# Altium PCB PCB2.PcbDoc
Units mil, origin at the board's own origin, x right, y up, seen from the top; angles counter-clockwise.
Board outline 2000 x 1200 mil, 4 copper layers (Top Layer, Internal Plane 1, Signal Layer 1, Bottom Layer), stack 30.634 mil thick; 22 components, 25 nets, 118 pads, 19 vias.
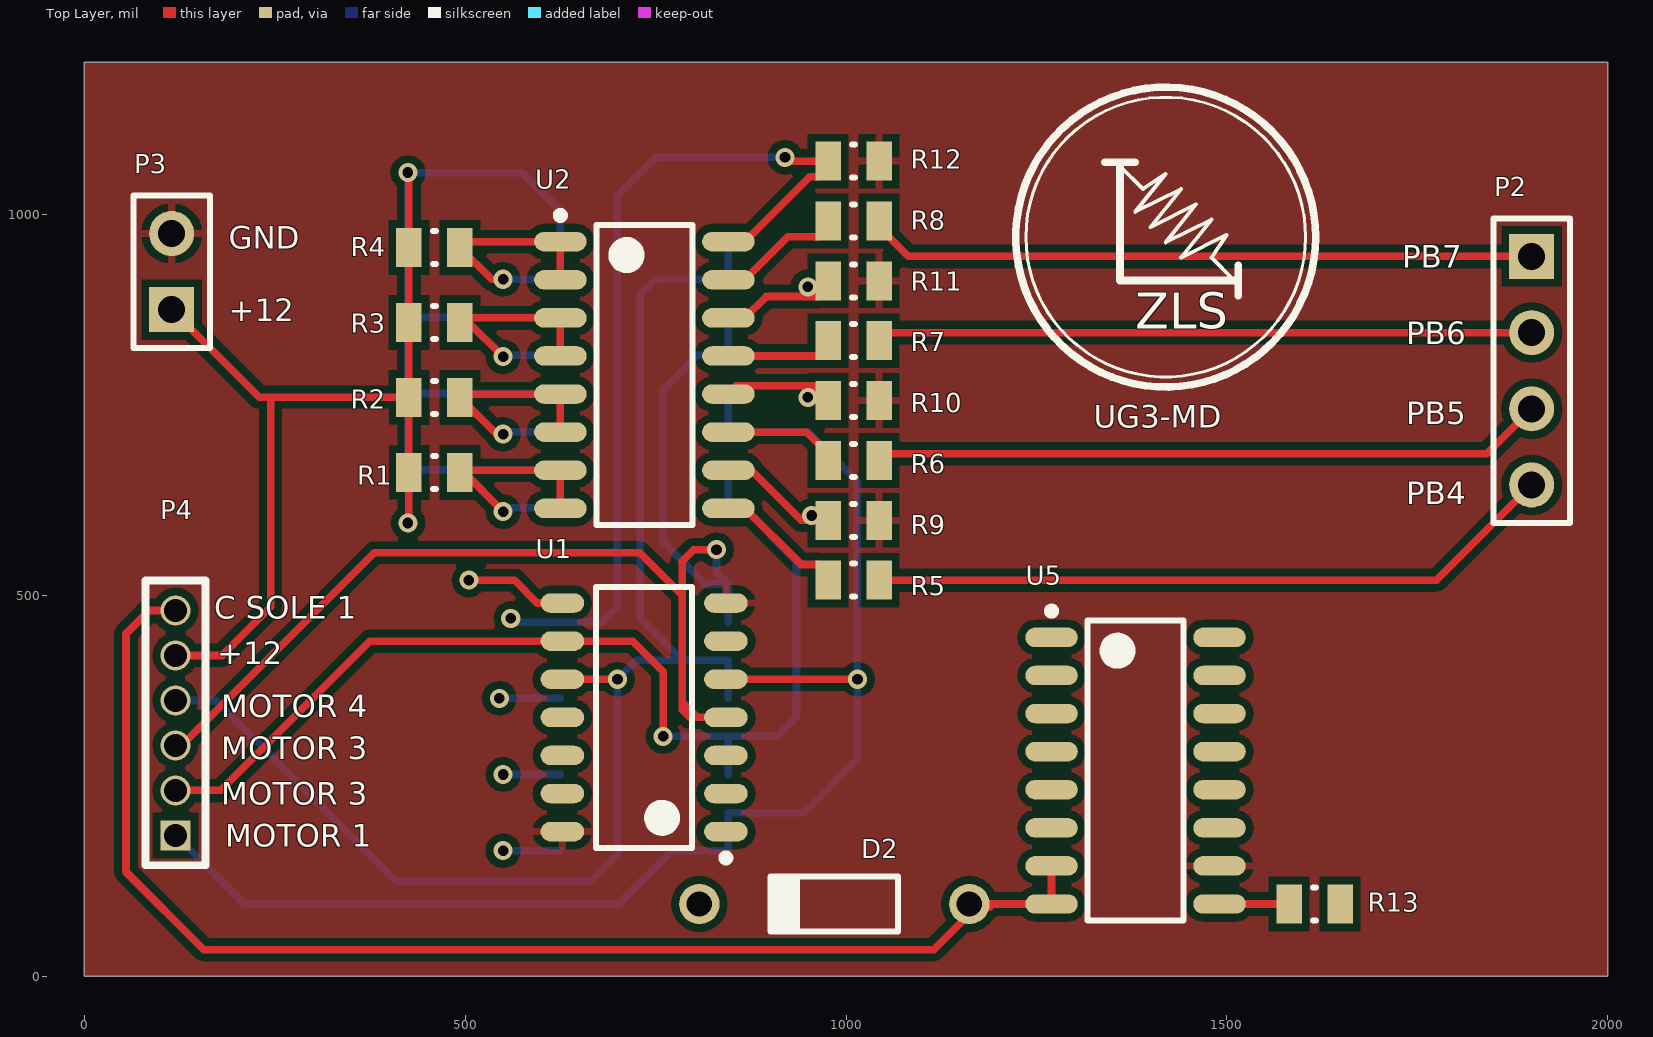
[diagram p0: Top Layer view]
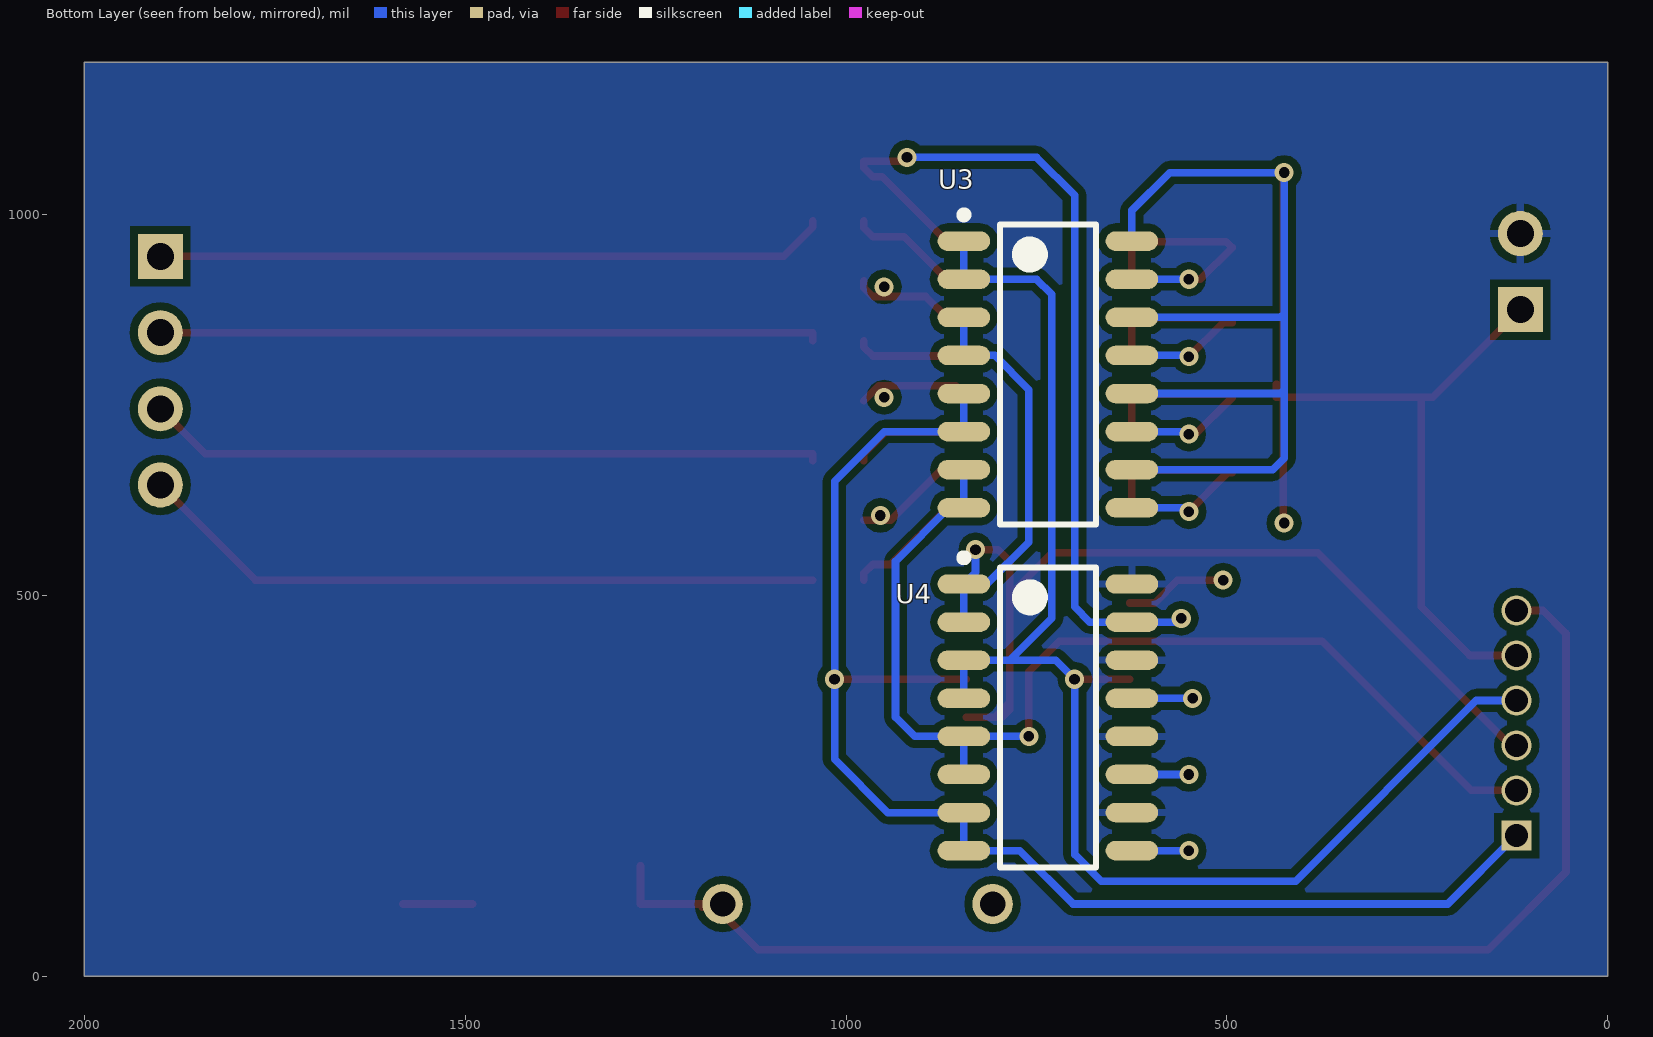
[diagram p1: Bottom Layer view, seen from below]
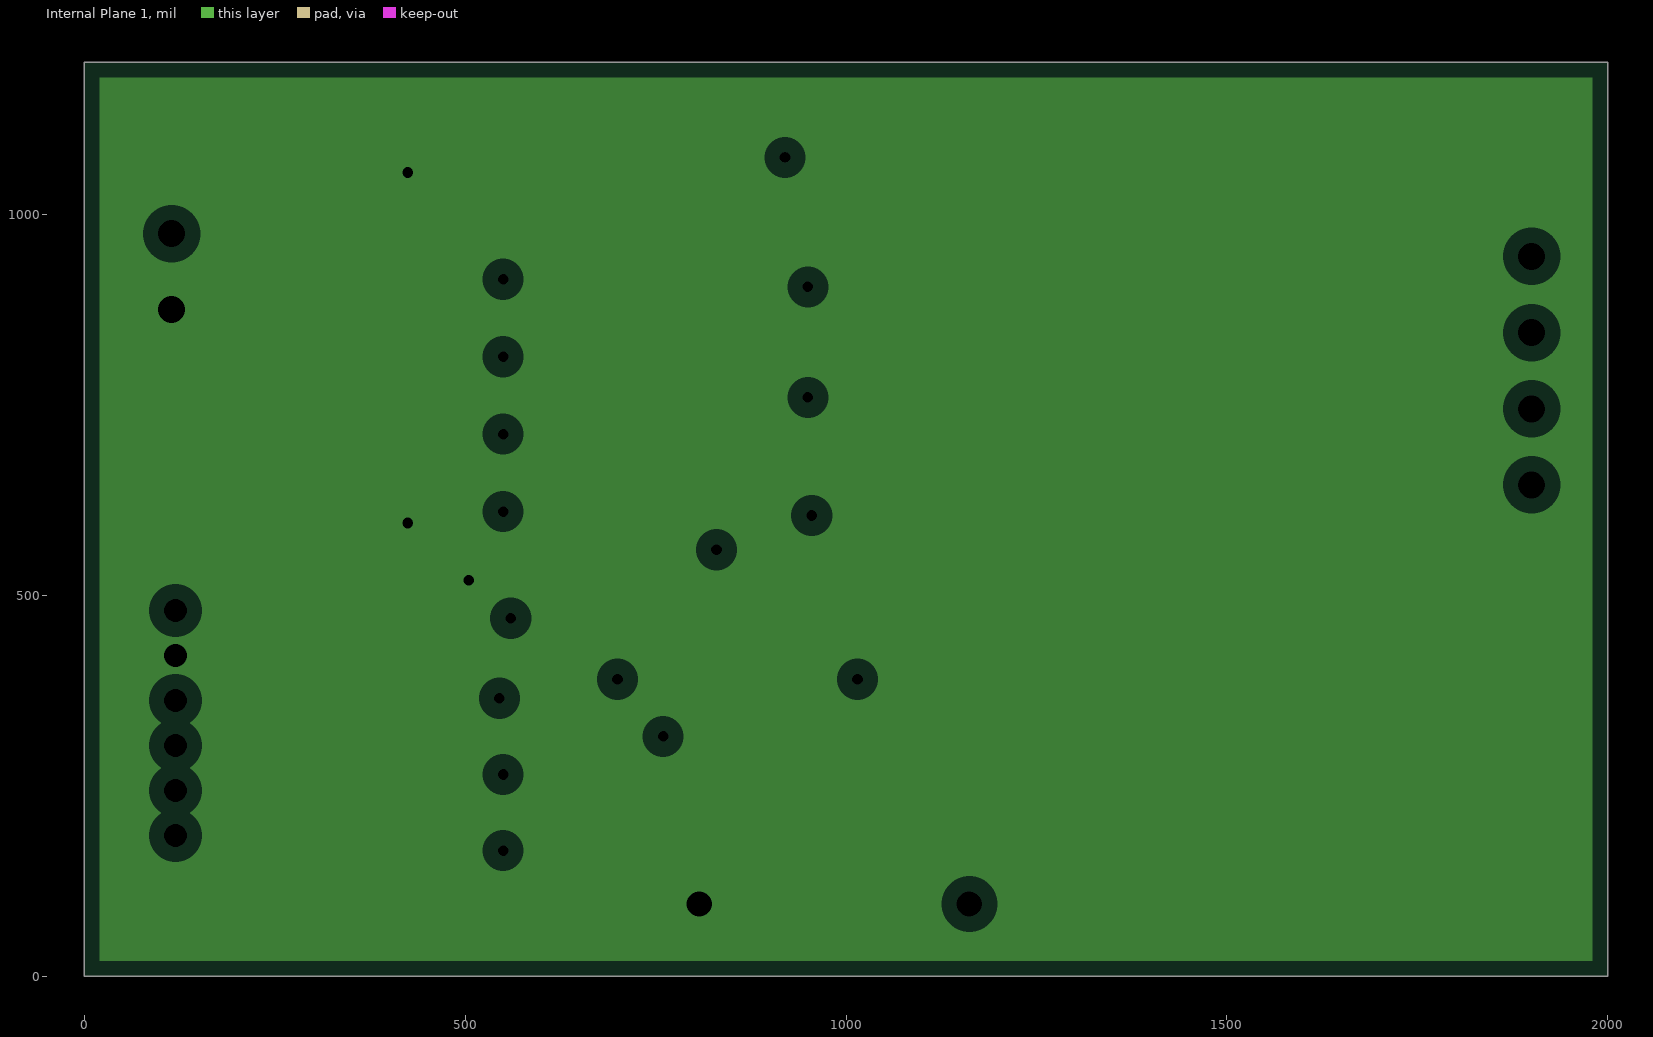
[diagram p2: Internal Plane 1, clearances drawn from the general rule]
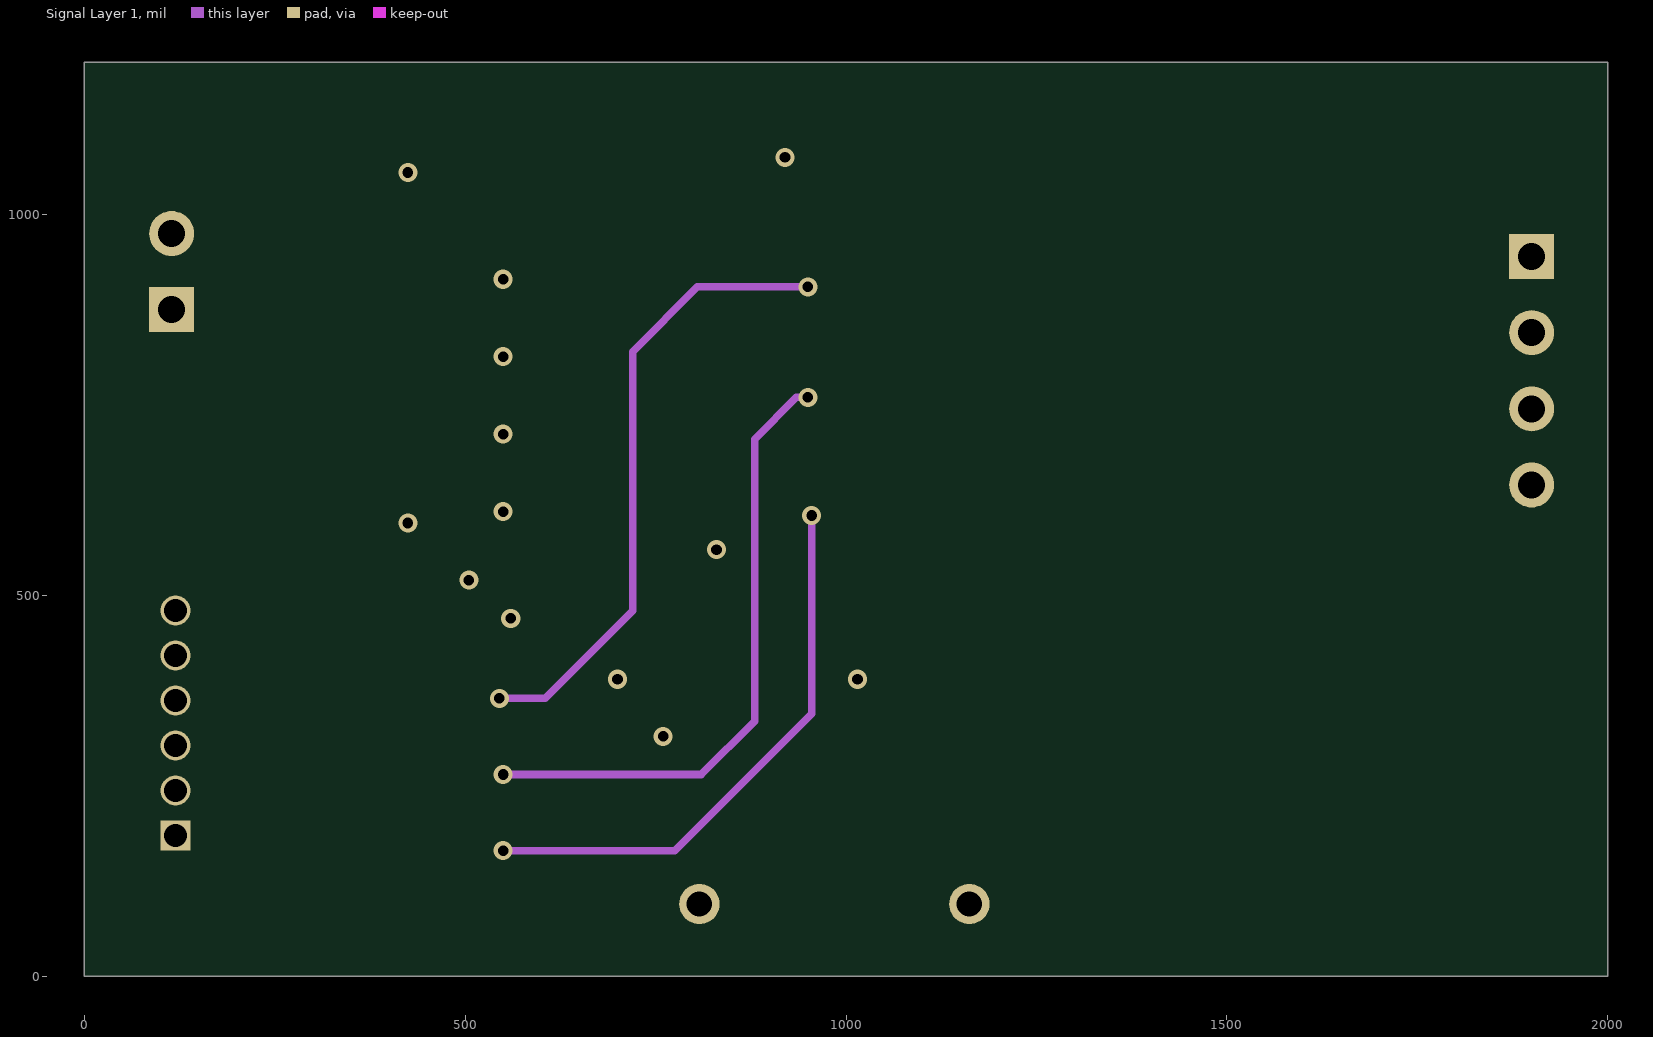
[diagram p3: Signal Layer 1]

## Layer stack, top to bottom
Top Solder: solder mask 0.4, Solder Resist, Dk 3.5
Top Layer: signal copper 1.4
Dielectric 1: core 10, FR-4, Dk 4.2
Internal Plane 1: plane copper 1.417, net +12
Dielectric 3: prepreg 5, Dk 4.2
Signal Layer 1: signal copper 1.417
Dielectric 2: core 10, Dk 4.2
Bottom Layer: signal copper 1.4
Bottom Solder: solder mask 0.4, Solder Resist, Dk 3.5

## Board outline
0,0 2000,0 2000,1200 0,1200

## Design rules (kind name [scope] priority, off if disabled: settings)
Clearance [All] p1: gap=10 ignorepadtopadclearanceinfootprint=FALSE except(0: Arc-Hole Track-Hole SMDPad-Hole THPad-Hole Via-Hole Fill-Hole Poly-Hole Region-Hole Text-Hole)
PlaneClearance [All] p1: clearance=20
PlaneConnect [All] p1: planeconnectstyle=Relief reliefexpansion=20 reliefentries=4 reliefconductorwidth=10 reliefairgap=10
PolygonConnect [All] p1: connectstyle=Relief reliefconductorwidth=10 reliefentries=4 polygonreliefangle="90 Angle" airgapwidth=10
RoutingVias [All] p1: holewidth=28 width=50 viastyle="Through Hole" minholewidth=28 minwidth=50 maxholewidth=28 maxwidth=50
SilkToSolderMaskClearance [IsPad] p1: minsilkscreentomaskgap=5 clearancetoexposedcopper=TRUE
SolderMaskExpansion [All] p1: expansion=4
Width [All] p1: maxlimit=10 minlimit=10 preferedwidth=10
27 further rules are at their usual default settings.

## Components (designator, comment, footprint, x,y, rotation, side; value= is the part's Value field where it differs from the comment)
D2 "1N4148" NXP-SOD27-2_V 984.73,95 r180 top
P2 "Header 4" HDR1X4 1900,945 r270 top
P3 "Header 2" HDR1X2 115,875 r90 top
P4 "JF-6" JF-6 120,185 r90 top
R1 "100k" RESC0805(2012)_L 459.8,661.34 r0 top
R2 "100k" RESC0805(2012)_L 459.8,759.76 r0 top
R3 "100k" RESC0805(2012)_L 459.8,858.19 r0 top
R4 "100k" RESC0805(2012)_L 459.8,956.61 r0 top
R5 "100k" RESC0805(2012)_L 1010,520 r0 top
R6 "100k" RESC0805(2012)_L 1010,677.14 r0 top
R7 "100k" RESC0805(2012)_L 1010,834.29 r0 top
R8 "100k" RESC0805(2012)_L 1010,991.43 r0 top
R9 "100k" RESC0805(2012)_L 1010,598.57 r180 top
R10 "100k" RESC0805(2012)_L 1010,755.71 r180 top
R11 "100k" RESC0805(2012)_L 1010,912.86 r180 top
R12 "100k" RESC0805(2012)_L 1010,1070 r180 top
R13 "1.2k" RESC0805(2012)_L 1615,95 r0 top value=100k
U1 "MMAD1107" MMAD1107 735,340 r180 top
U2 "MMPQ2222A" MMPQ2222A 735.39,789.29 r0 top
U3 "MMPQ22907A" MMPQ22907A 735,790 r180 bottom
U4 "MMPQ2222A" MMPQ2222A 735,340 r180 bottom
U5 "MMPQ2222A" MMPQ2222A 1380,270 r0 top

## Footprints (in the part's own frame and the unit in brackets; to place one, negate y for a bottom-side part, rotate by r counter-clockwise, add the part's x,y. Pads: shape width x height; smd on the part's side, far side on the other; paste and mask are expansions set on the pad)
HDR1X2 [mm] "Connector; Header; 2 Position"
  rect 1.5x1.5 hole 0.9: 1(0,0)
  round 1.5 hole 0.9: 2(2.54,0)
  silkscreen extent -1.27,-1.27 3.81,1.27
HDR1X4 [mm] "Connector; Header; 4 Position"
  rect 1.5x1.5 hole 0.9: 1(0,0)
  round 1.5 hole 0.9: 2(2.54,0) 3(5.08,0) 4(7.62,0)
  silkscreen extent -1.27,-1.27 8.89,1.27
JF-6 [mm] "Microtech Connector"
  rect 1x1 hole 0.762: 1(0,0)
  round 1 hole 0.762: 2(1.5,0) 3(3,0) 4(4.5,0) 5(6,0) 6(7.5,0)
  silkscreen extent -1,-1 8.5,1
MMAD1107 [mm] "SOIC, 14-Leads, Body 8.63x3.91mm, Pitch 1.27mm, IPC Medium Density"
  oval 1.45x0.65 smd: 1(-2.725,3.81) 2(-2.725,2.54) 3(-2.725,1.27) 4(-2.725,0) 5(-2.725,-1.27) 6(-2.725,-2.54) 7(-2.725,-3.81) 8(2.725,-3.81) 9(2.725,-2.54) 10(2.725,-1.27) 11(2.725,0) 12(2.725,1.27) 13(2.725,2.54) 14(2.725,3.81)
  silkscreen extent -2.85,-4.35 1.6,4.81, body extent -2.99,-4.35 3,4.35, height 1.75
MMPQ2222A [mm]
  oval 1.75x0.65 smd: 1(-2.8,4.445) 2(-2.8,3.175) 3(-2.8,1.905) 4(-2.8,0.635) 5(-2.8,-0.635) 6(-2.8,-1.905) 7(-2.8,-3.175) 8(-2.8,-4.445) 9(2.8,-4.445) 10(2.8,-3.175) 11(2.8,-1.905) 12(2.8,-0.635) 13(2.8,0.635) 14(2.8,1.905) 15(2.8,3.175) 16(2.8,4.445)
  silkscreen extent -2.92,-5 1.6,5.44, body extent -2,-5 2,5, height 1.75
MMPQ22907A [mm]
  oval 1.75x0.65 smd: 1(-2.8,4.445) 2(-2.8,3.175) 3(-2.8,1.905) 4(-2.8,0.635) 5(-2.8,-0.635) 6(-2.8,-1.905) 7(-2.8,-3.175) 8(-2.8,-4.445) 9(2.8,-4.445) 10(2.8,-3.175) 11(2.8,-1.905) 12(2.8,-0.635) 13(2.8,0.635) 14(2.8,1.905) 15(2.8,3.175) 16(2.8,4.445)
  silkscreen extent -2.93,-5 1.6,5.44, body extent -2,-5 2,5, height 1.75
NXP-SOD27-2_V [mm] "SOD27, 2-Leads, Dia 1.85mm, Body Length 4.25mm, Pin Spacing 9mm"
  round 1.35 hole 0.85: 1(-4.5,0) 2(4.5,0)
  silkscreen extent -2.12,-0.92 2.12,0.92, body extent -4.78,-0.92 4.78,0.92, height 1.84
RESC0805(2012)_L [mm] "Chip Resistor, Body 2.0x1.3mm, IPC High Density"
  rect 0.85x1.3 smd: 1(-0.85,0) 2(0.85,0)
  silkscreen extent -0.05,-0.55 0.05,0.55, body extent -1.1,-0.67 1.1,0.68, height 0.7

## Part data
D2: library part CMP-0648-00002-1, "High-speed Diode, 100 V, 450 mA, 2-Pin SOD27, RoHS", Manufacturer="NXP Semiconductors", Cd="4 pF Max.", ComponentLink1Description="Manufacturer URL", ComponentLink1URL=http://www.nxp.com/, ComponentLink2Description=Datasheet, ComponentLink2URL=http://www.nxp.com/documents/data_sheet/1N4148_1N4448.pdf, ComponentLink3Description="Package Specification", ComponentLink3URL=http://www.nxp.com/documents/data_sheet/1N4148_1N4448.pdf, Configuration=Single, DatasheetVersion=Aug-04, IF="200 mA Max.", IFRM="450 mA", IFSM="4 A Max.", IR (VR="20 V)=25 nA", Mounting Technology="Through Hole", PackageDescription="2-Pin Hermetically Sealed Glass Package, Axial Leaded, Dia 1.85 mm, Body Length 4.25 mm, Lead Spread 25.4 mm", PackageReference=SOD27, PackageVersion=Aug-04, PartNumber=1N4148, RoHS=TRUE, Trr="4 ns Max.", VF (IF="10 mA)=1 V", VR="100 V Max."
P2: "Header, 4-Pin", LatestRevisionDate=17-Jul-2002, LatestRevisionNote="Re-released for DXP Platform.", Publisher="Altium Limited"
P3: "Header, 2-Pin", LatestRevisionDate=17-Jul-2002, LatestRevisionNote="Re-released for DXP Platform.", Publisher="Altium Limited"
R1 R2 R3 R4 R5 R6 R7 R8 R9 R10 R11 R12 R13: library part CMP-1013-00215-1, "2R55 0.125W 1% 0805 (2012 Metric)  SMD", Case-EIA=0805, Case-Metric=2012, Power="0.125 W", Tolerance="1 %", Technology=SMT

## Via types
v1: diameter 25, hole 14, Top Layer to Bottom Layer, 19 vias

## Nets (pads, with @x,y where several pads share a name; then routed paths per layer and width w, separated by ;. In a path a pad name is that pad's centre, name@x,y a point inside that pad or via, vN(x,y) a via of type N, cw(c..) or ccw(c..) an arc to the next point about the centre after c; other vN are vias at no path point)
+12: D2.2 P3.1 P4.5 R1.1 R2.1 R3.1 R4.1 U1.8 U3.10 U3.12 U3.14 U3.16 | length 2665.1
  Top Layer w10: P3.1 230,760 245,760 ; P4.5 181.22,421.22 245,485 245,760 ; v1(425,595) 426.34,596.34 R1.1 R2.1 R2.1@426.34,760 ; v1(425,1055) 426.34,1053.66 R4.1 R3.1 R2.1@426.34,768.62 ; v1(505,520) 565,520 595,490 U1.8 ; 245,760 R2.1@426.34,760 ; R2.1@426.34,760 435,760 435,777.28 R2.1@426.34,768.62 ; R2.1@426.34,760 R2.1@426.34,768.62
  Bottom Layer w10: U3.10 440,665 425,680 425,770 ; U3.12 430,765 425,770 ; U3.14 430,865 425,870 ; U3.16 624.76,1005.24 575,1055 v1(425,1055) 425,870 ; 425,770 425,870
BAT_COM: P3.2 R9.1 R10.1 R11.1 R12.1 U1.7 U1.14 U4.10 U4.12 U4.14 U4.16 U5.10
"C MOTOR 1": P4.1 U1.5 U3.5 U3.6 U4.7 U4.8 | length 1824.7
  Top Layer w10: U1.5 v1(1015,390)
  Bottom Layer w10: P4.1 210,95 702,95 772,165 U4.8 U4.7 945,215 1015,285 1015,650 950,715 U3.6 U3.5
"C MOTOR 2": P4.2 U1.9 U3.7 U3.8 U4.5 U4.6 | length 1431.8
  Top Layer w10: P4.2 179.06,244.06 375,440 U1.9 720,440 760,400 v1(760,315)
  Bottom Layer w10: v1(760,315) U4.5 ; U4.6 U4.5 ; U3.7 U3.8 865,615 935,545 935,340 910,315 U4.5
"C MOTOR 3": P4.3 U1.4 U3.3 U3.4 U4.1 U4.2 | length 1832.1
  Top Layer w10: P4.3 128.11,303.11 381,556 729,556 785,500 785,360 ; v1(830,560) 800,560 785,545 785,360 ; U1.4 805,340 ; 785,360 785,350 795,340 805,340 ; 785,360 805,340
  Bottom Layer w10: v1(830,560) 830,530.24 U4.1 ; U4.2 U4.1 ; U3.3 U3.4 805,815 760,770 760,570 815,515 U4.1
"C MOTOR 4": P4.4 U1.10 U3.1 U3.2 U4.3 U4.4 | length 1876.9
  Top Layer w10: U1.10 v1(700,390)
  Bottom Layer w10: P4.4 172.83,362.17 410,125 665,125 700,160 v1(700,390) 725,415 785,415 ; U4.4 U4.3 785,415 ; U3.1 U3.2 750,915 730,895 730,470 785,415
"C SOLE 2": D2.1 P4.6 U5.7 U5.8 | length 1724.8
  Top Layer w10: P4.6 85.28,480.28 55,450 55,137 157,35 1115,35 1171,91 1188.78,91 1188.78,95 U5.8 U5.7
NetR1_2: R1.2 U2.7 U2.8 U3.9 | length 337.9
  Top Layer w10: v1(550,610) 498.66,661.34 R1.2 496.22,664.29 U2.7 U2.8
  Bottom Layer w10: v1(550,610) 555,615 U3.9
NetR2_2: R2.2 U2.5 U2.6 U3.11 | length 336.6
  Top Layer w10: v1(550,711.67) 541.36,711.67 R2.2 497.8,764.29 U2.5 625.16,759.76 U2.6
  Bottom Layer w10: v1(550,711.67) 553.33,715 U3.11
NetR3_2: R3.2 U2.3 U2.4 U3.13 | length 335.2
  Top Layer w10: v1(550,813.33) 505.14,858.19 R3.2 499.37,864.29 U2.3 U2.4
  Bottom Layer w10: v1(550,813.33) 551.67,815 U3.13
NetR4_2: R4.2 U2.1 U2.2 U3.15 | length 333.8
  Top Layer w10: v1(550,915) 534.88,915 R4.2 500.94,964.29 U2.1 U2.2
  Bottom Layer w10: v1(550,915) U3.15
NetR5_1: R5.1 U2.9 | length 175.2
  Top Layer w10: U2.9 867.28,614.29 940.98,540.59 964.8,540.59 976.54,528.86 R5.1
NetR6_1: R6.1 U2.11 | length 151.5
  Top Layer w10: U2.11 948.25,714.29 976.54,686 R6.1
NetR7_1: R7.1 U2.13 | length 144
  Top Layer w10: U2.13 964.8,814.29 976.54,826.02 R7.1
NetR8_1: R8.1 U2.15 | length 168
  Top Layer w10: U2.15 867.28,914.29 923.83,970.84 964.8,970.84 976.54,982.57 R8.1
NetR9_2: R9.2 U2.10 U4.9 | length 972.5
  Top Layer w10: U2.10 875.71,664.29 941.43,598.57 R9.2
  Signal Layer 1 w10: v1(550,165) 775,165 955,345 v1(955,605)
  Bottom Layer w10: v1(550,165) U4.9
NetR10_2: R10.2 U2.12 U4.11 | length 1039.9
  Top Layer w10: U2.12 856.34,775 957.25,775 R10.2
  Signal Layer 1 w10: v1(550,265) 810,265 880,335 880,705 935,760 v1(950,760)
  Bottom Layer w10: v1(550,265) U4.11
NetR11_2: R11.2 U2.14 U4.13 | length 1063.8
  Top Layer w10: U2.14 867.28,864.29 895.26,892.27 964.8,892.27 976.54,904 R11.2
  Signal Layer 1 w10: v1(545,365) 605,365 720,480 720,820 805,905 v1(950,905)
  Bottom Layer w10: v1(545,365) U4.13
NetR12_2: R12.2 U2.16 U4.15 | length 1169.6
  Top Layer w10: U2.16 867.28,964.29 952.4,1049.41 964.8,1049.41 976.54,1061.14 R12.2 925,1070 v1(920,1075)
  Bottom Layer w10: v1(560,470) 565,465 U4.15 680,465 700,485 700,1025 750,1075 v1(920,1075)
NetR13_1: R13.1 U5.9 | length 91.3
  Top Layer w10: U5.9 R13.1
PB4: P2.4 R5.2 | length 908.3
  Top Layer w10: R5.2 1775,520 P2.4
PB5: P2.3 R6.2 | length 889.8
  Top Layer w10: R6.2 1043.46,686 1841,686 P2.3
PB6: P2.2 R7.2 | length 867.2
  Top Layer w10: R7.2 1043.46,845 P2.2
PB7: P2.1 R8.2 | length 880.7
  Top Layer w10: R8.2 1043.46,983 1081.46,945 P2.1
PC5: R13.2
pads on no net: U1.1 U1.2 U1.3 U1.6 U1.11 U1.12 U1.13 U5.1 U5.2 U5.3 U5.4 U5.5 U5.6 U5.11 U5.12 U5.13 U5.14 U5.15 U5.16

## Polygon pours and split planes (outlines as drawn)
BAT_COM on Top Layer "GND" (solid, pour order 0): 0,1200 0,0 2000,0 2000,1200
BAT_COM on Bottom Layer "GND" (solid, pour order 2): 0,1200 0,0 2000,0 2000,1200
+12 on Internal Plane 1 (split plane): 1979.9,20.1 20.1,20.1 20.1,1179.9 1979.9,1179.9

## Silkscreen, mask and mechanical layers (free items; w line width, h text height)
Top Overlay:
  circle w10: c1419.62,970.33 r196.85
  circle w3.94: c1419.62,970.33 r183.58
  lines w5: 1359.62,1063.33 1389.62,1033.33 1419.62,1053.33 1379.62,1003.33 1439.62,1033.33 1399.62,983.33 1459.62,1013.33 1419.62,963.33 1479.62,993.33 1439.62,943.33 1499.62,973.33 1479.62,943.33 1509.62,913.33
  lines w10: 1339.62,1068.33 1379.62,1068.33 ; 1359.62,1063.33 1359.62,913.33 1509.62,913.33 ; 1514.62,893.33 1514.62,933.33
  text "GND" at 190,955 h29.53
  text "PB7" at 1730,930 h29.53
  text "+12" at 190,860 h29.53
  text "ZLS" at 1379.62,850.33 h47.24
  text "PB6" at 1735,830 h29.53
  text "PB5" at 1735,725 h29.53
  text "UG3-MD" at 1325,720 h29.53
  text "PB4" at 1735,620 h29.53
  text "C SOLE 1" at 170.81,469.19 h29.53
  text "+12" at 175,410 h29.53
  text "MOTOR 4" at 180,340 h29.53
  text "MOTOR 3" at 180,285 h29.53
  text "MOTOR 3" at 180,225 h29.53
  text "MOTOR 1" at 185,170 h29.53

## Dimensions
2000,0 to 0,0 on Mechanical 13
0,0 to 0,1200 on Mechanical 13